# EAGLE board product_compass (EAGLE 8.6.3)
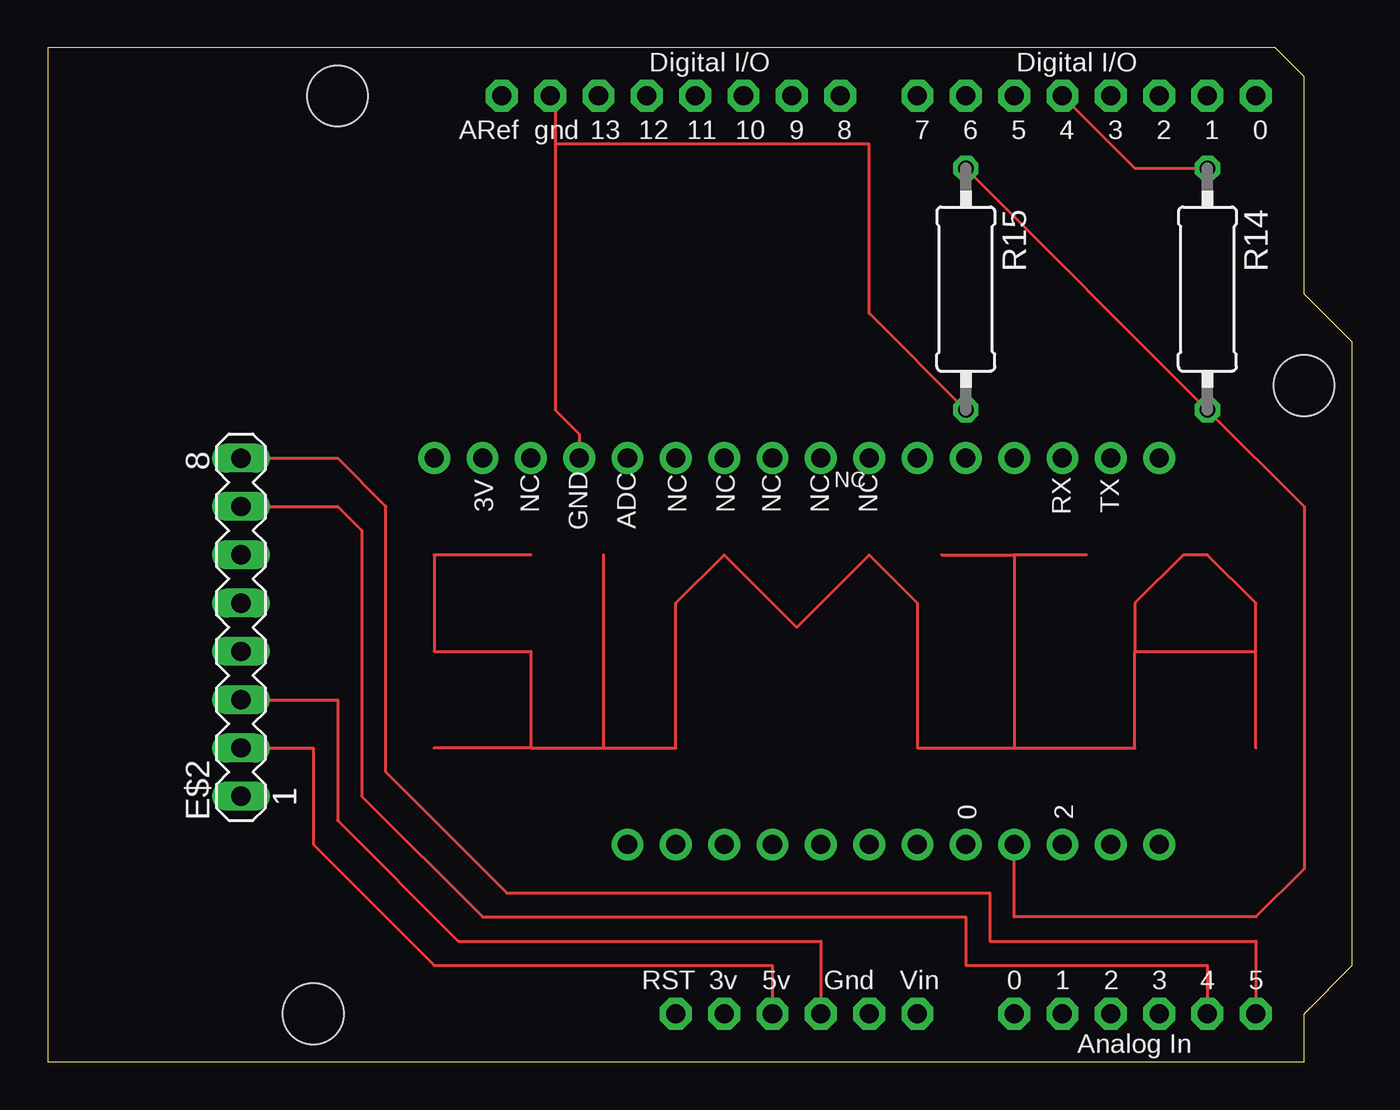
[diagram p0: board, top side]
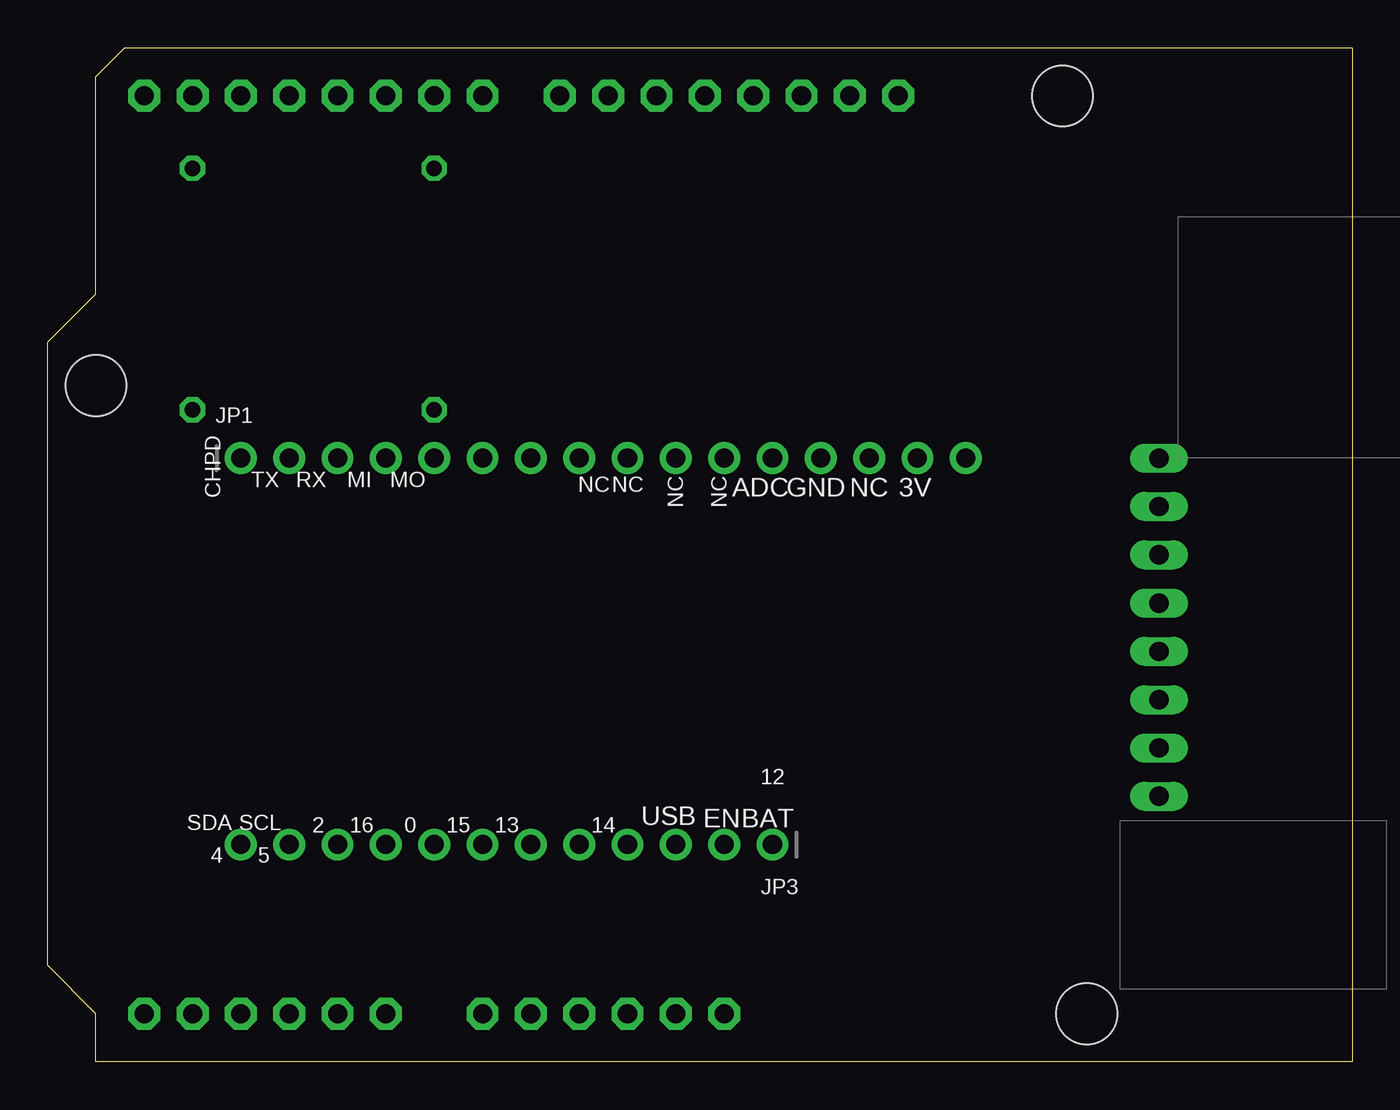
[diagram p1: board, bottom side, seen from below]

Size 68.58 x 53.34 mm. Coordinates in mm from the lower left corner, seen from the top.
Copper layers (1*16): Top 0.035mm / dielectric 1.5mm / Bottom 0.035mm
Design rules "default": minimum track width 6mil, minimum drill 0.35mm, track to track 6mil, track to pad 6mil, pad to pad 6mil, via to via 6mil, smd to smd 6mil, copper to edge 40mil, drill to drill 6mil, minimum pad ring 10mil, minimum via ring 8mil, stop-mask expansion 4mil, vias tented up to drill 0mil, thermal gap 10mil

## Footprints (pad centres in the part's own frame; a part is rotated, then mirrored left to right if it is on the bottom)
MA08-1 = drill 1.016 long: 1 -8.89,0; 2 -6.35,0; 3 -3.81,0; 4 -1.27,0; 5 1.27,0; 6 3.81,0; 7 6.35,0; 8 8.89,0
1X16_ROUND = drill 1 pad 1.676: 1 -19.05,0; 2 -16.51,0; 3 -13.97,0; 4 -11.43,0; 5 -8.89,0; 6 -6.35,0; 7 -3.81,0; 8 -1.27,0; 9 1.27,0; 10 3.81,0; 11 6.35,0; 12 8.89,0; 13 11.43,0; 14 13.97,0; 15 16.51,0; 16 19.05,0
1X12_ROUND = drill 1 pad 1.676: 1 -13.97,0; 2 -11.43,0; 3 -8.89,0; 4 -6.35,0; 5 -3.81,0; 6 -1.27,0; 7 1.27,0; 8 3.81,0; 9 6.35,0; 10 8.89,0; 11 11.43,0; 12 13.97,0
0309/12 = drill 0.813 octagon: 1 -6.35,0; 2 6.35,0
ARDUINO = drill 1 pad 1.676 octagon: 3V 35.56,2.54; 5V 38.1,2.54; A0 50.8,2.54; A1 53.34,2.54; A2 55.88,2.54; A3 58.42,2.54; A4 60.96,2.54; A5 63.5,2.54; AREF 23.876,50.8; D0 63.5,50.8; D1 60.96,50.8; D2 58.42,50.8; D3 55.88,50.8; D4 53.34,50.8; D5 50.8,50.8; D6 48.26,50.8; D7 45.72,50.8; D8 41.656,50.8; D9 39.116,50.8; D10 36.576,50.8; D11 34.036,50.8; D12 31.496,50.8; D13 28.956,50.8; GND 26.416,50.8; GND1 43.18,2.54; GND2 40.64,2.54; RESET 33.02,2.54; VIN 45.72,2.54 | hole 3.2: 15.24,50.8; 66.04,35.56; 13.97,2.54

## Placement (x,y rotation side)
E$2  [MA08-1]  10.16,22.86 90 top
JP1  [1X16_ROUND]  39.37,31.75 0 bottom
JP3  [1X12_ROUND]  44.45,11.43 180 bottom
R14  [0309/12]  60.96,40.64 270 top
R15  [0309/12]  48.26,40.64 270 top
U$1  ARDUINOUNO  [ARDUINO]  0,0 0 top

## Library data of the parts
E$2 = con-lstb
JP1 JP3 = microbuilder
R14 R15 = resistor
U$1 = adafruit

## Nets
3V: U$1.3V
GND2: E$2.3 U$1.GND2
GPIO2: JP3.10
GPIO16: JP3.9 R14.2 R15.1
N$14: R14.1 U$1.D4
S$1: E$2.7 U$1.A4
S$3: E$2.2 U$1.5V
S$4: JP1.13 R15.2
S$5: E$2.8 U$1.A5
S$44: JP1.2
VIN: U$1.VIN

## Tracks (layer width: path | path; a pad name or v marks a point on that pad's centre or on a via)
GND2
  Top 0.152: U$1.GND2 40.64,6.35 21.59,6.35 15.24,12.7 15.24,19.05 E$2.3
GPIO2
  Bottom 0.254: 53.34,11.56 JP3.10
GPIO16
  Top 0.152: R15.1 R14.2 66.04,29.21 66.04,10.16 63.5,7.62 50.8,7.62 JP3.9
  Bottom 0.152: 50.8,11.61 JP3.9
N$14
  Top 0.152: U$1.D4 57.15,46.99 R14.1
S$1
  Top 0.152: E$2.7 15.24,29.21 16.51,27.94 16.51,13.97 22.86,7.62 48.26,7.62 48.26,5.08 60.96,5.08 U$1.A4
S$2
  Top 0.152: 25.4,26.67 20.32,26.67 20.32,21.59 25.4,21.59 25.4,16.51 | 25.4,16.51 20.32,16.51 | 25.4,16.51 29.21,16.51 | 29.21,26.67 29.21,16.51 | 29.21,16.51 33.02,16.51 33.02,24.13 35.56,26.67 39.37,22.86 43.18,26.67 45.72,24.13 45.72,16.51 50.8,16.51 | 46.99,26.67 50.8,26.67 | 54.61,26.67 50.8,26.67 | 50.8,26.67 50.8,16.51 | 50.8,16.51 57.15,16.51 57.15,21.59 | 57.15,21.59 57.15,24.13 59.69,26.67 60.96,26.67 63.5,24.13 63.5,21.59 | 63.5,16.51 63.5,21.59 | 57.15,21.59 63.5,21.59
S$3
  Top 0.152: E$2.2 13.97,16.51 13.97,11.43 20.32,5.08 38.1,5.08 U$1.5V
S$4
  Top 0.152: R15.2 43.18,39.37 43.18,48.26 26.67,48.26 | 26.67,48.26 26.67,34.29 27.94,33.02 JP1.13 | 26.67,50.8 26.67,48.26
S$5
  Top 0.152: U$1.A5 63.5,6.35 49.53,6.35 49.53,8.89 24.13,8.89 17.78,15.24 17.78,29.21 15.24,31.75 E$2.8
S$44
  Bottom 0.254: 56.06,31.57 JP1.2

## Text on the board
tPlace: NC | 3V | NC | GND | ADC | NC | NC | NC | NC | NC | RX | TX | 0 | 2
bPlace: MO | MI | RX | TX | CHPD | 3V | NC | GND | ADC | NC | NC | NC | NC | 12 | BAT | EN | USB | SCL | SDA | 14 | 13 | 15 | 0 | 16 | 2 | 5 | 4